# Altium PCB PC110.PcbDoc (part 19 of 24)
Units mm, origin at the board's own origin, x right, y up, seen from the top; angles counter-clockwise.
Board outline 150.05 x 107.35 mm, 10 copper layers (In2.Cu, F.Cu, B.Cu, In1.Cu, In3.Cu, In4.Cu, In5.Cu, In6.Cu, In7.Cu, In8.Cu); 936 components, 1434 nets, 4891 pads, 6088 vias.
Unrouted connection lines stored in the file: 2995.
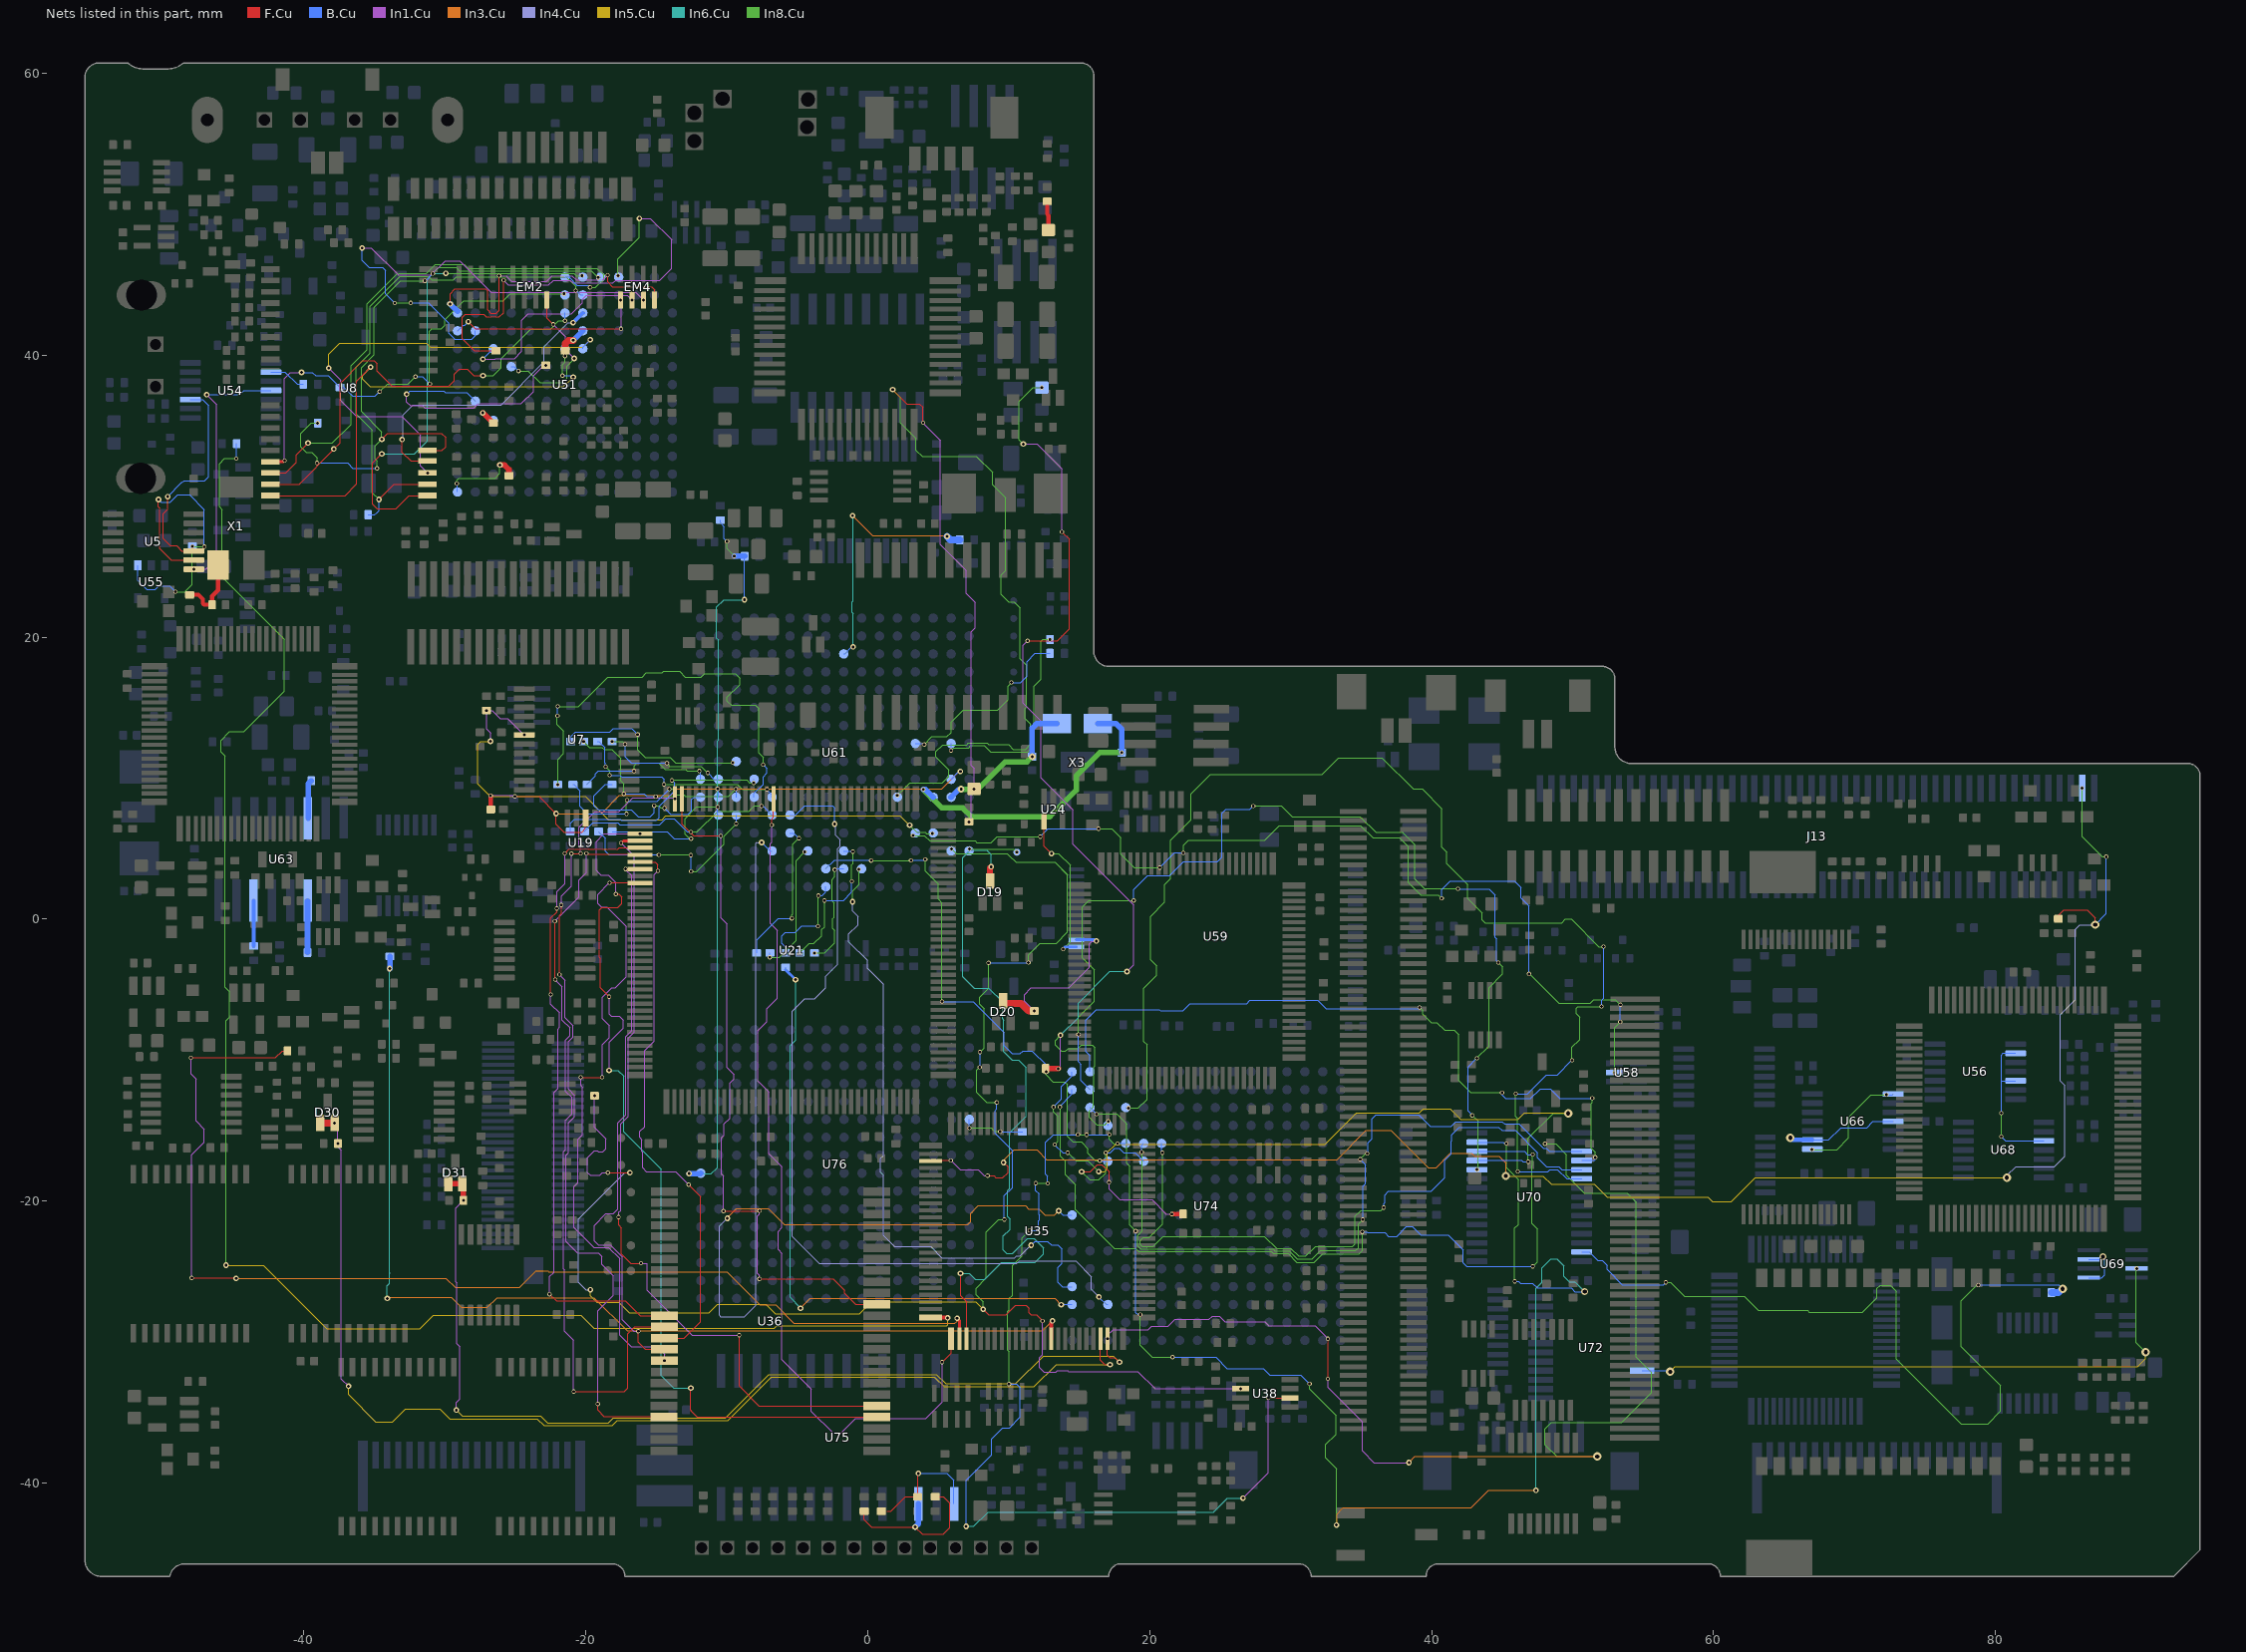
[diagram p26: the nets of this part, all layers, seen from the top]

## Via types
v1: diameter 0.3, hole 0.2, B.Cu to In8.Cu, tented both sides, 1934 vias
v2: diameter 0.4, hole 0.2, F.Cu to B.Cu, tented both sides, 1902 vias
v3: diameter 0.3, hole 0.2, F.Cu to In1.Cu, tented both sides, 1729 vias
v4: diameter 0.6, hole 0.3, F.Cu to B.Cu, tented both sides, 354 vias
v5: diameter 0.5, hole 0.3, F.Cu to B.Cu, tented both sides, 136 vias
v6: diameter 0.4, hole 0.2, B.Cu to In8.Cu, tented both sides, 12 vias
v7: diameter 0.3, hole 0.2, F.Cu to B.Cu, tented both sides, 6 vias
v8: diameter 0.6, hole 0.2, F.Cu to B.Cu, tented both sides, 4 vias
v9: diameter 0.5, hole 0.2, B.Cu to In8.Cu, tented both sides, 3 vias
v10: diameter 0.5, hole 0.2, F.Cu to B.Cu, tented both sides, 2 vias
v11: diameter 0.4, hole 0.3, F.Cu to B.Cu, tented both sides, 2 vias
v12: diameter 0.3, hole 0.2, F.Cu to In4.Cu, tented both sides, 2 vias
v13: diameter 0.6, hole 0.3, B.Cu to In8.Cu, tented both sides, 1 vias
v14: diameter 0.3, hole 0.2, F.Cu to In3.Cu, tented both sides, 1 vias

## Nets (pads, with @x,y where several pads share a name; then routed paths per layer and width w, separated by ;. In a path a pad name is that pad's centre, name@x,y a point inside that pad or via, vN(x,y) a via of type N, cw(c..) or ccw(c..) an arc to the next point about the centre after c; other vN are vias at no path point) (continued)
Net-(U51-P11): EM2.8 U51.D6 | length 11.1
  F.Cu w0.08: EM2.8@-22.755,43.91 -22.755,42.635 v3(-22.31,42.19)
  In1.Cu w0.08: v3(-22.31,42.19) -21.45,41.33 -21.45,40.4 v2(-20.82,39.77)
  In8.Cu w0.08: v1(-24.77,38.88) -24.08,38.88 -23.26,38.06 -21.58,38.06 -21.32,38.32 -21.32,39.24 -20.82,39.74 v2(-20.82,39.77)
  B.Cu w0.08: U51.D6@-25.29,39.19 -25.08,39.19 v1(-24.77,38.88)
Net-(U51-P12): EM4.5 U51.A4 | length 14.1
  F.Cu w0.08: v2(-28.34,42.38) -27.83,41.87 v3(-17.49,41.87)
  In1.Cu w0.08: v3(-17.525,43.91) -17.49,43.875 v3(-17.49,41.87)
  B.Cu w0.08: U51.A4@-29.1,41.73 -29.09,41.73 -28.69,42.13 -28.59,42.13 v2(-28.34,42.38)
Net-(U51-P13): EM4.6 U51.C5 | length 15.1
  In1.Cu w0.08: v2(-27.3,39.72) -26.44,39.72 -26.39,39.77 -25.05,39.77 -24.55,40.27 -24.55,42.47 -24.08,42.94 -21,42.94 -20.24,43.7 -20.24,43.96 -19.96,44.24 -17.055,44.24 v3(-16.725,43.91)
  B.Cu w0.08: v2(-27.3,39.72) U51.C5@-26.56,40.46
Net-(U51-P14): EM4.7 U51.B4 | length 35.4
  In1.Cu w0.08: v2(-35.86,47.61) -35.23,47.61 -33.3,45.68 -30.99,45.68 -29.97,46.7 -28.94,46.7 -26.71,44.47 -16.46,44.47 v3(-15.9,43.91)
  In8.Cu w0.08: v1(-33.55,43.7) -32.42,43.7 v1(-32.41,43.71)
  B.Cu w0.08: v2(-35.86,47.61) -35.86,46.71 -35.38,46.23 -34.42,46.23 -34.2,46.01 -34.2,44.35 v1(-33.55,43.7) ; v1(-32.41,43.71) -32.4,43.7 -31.15,43.7 -29.72,42.27 -29.72,41.56 -29.29,41.13 -28.07,41.13 -27.83,41.37 U51.B4@-27.83,41.73
Net-(U51-P15): EM4.8 U51.A3 | length 22.3
  F.Cu w0.08: v2(-29.62,43.64) -29.62,44.37 -29.28,44.71 -27.1,44.71 -26.96,44.57 -26.96,43.21 -26.74,42.99 -26.36,42.99 -26.15,43.2 v3(-26.15,45.64) ; v3(-18.45,45.68) -18.45,45.19 -18.1,44.84 -15.32,44.84 -15.125,44.645 EM4.8@-15.125,43.91
  In1.Cu w0.08: v3(-26.15,45.64) -25.64,45.64 -25.25,45.25 -22.77,45.25 -22.38,45.64 -20.97,45.64 -20.67,45.34 -18.79,45.34 v3(-18.45,45.68)
  B.Cu w0.08: U51.A3@-29.1,43 U51.A3@-29.1,43.12
  B.Cu w0.4: v2(-29.62,43.64) U51.A3@-29.1,43.12
Net-(U51-RASA#): R21.2 U51.H4 | length 2.1
  F.Cu w0.5: R21.2@-21.46,40.31 -21.46,40.84 -21.24,41.06 v2(-20.89,41.06)
  B.Cu w0.08: v2(-20.89,41.06) v2@-20.88,41.06
  B.Cu w0.4: v2@-20.88,41.06 U51.H4@-20.21,41.73
Net-(U51-RSET): R66.2 U51.A13 | length 5.9
  F.Cu w0.4: v2(-26.09,32.22) -25.77,32.22 -25.45,31.9 R66.2@-25.45,31.46
  In8.Cu w0.08: v1(-29.15,30.9) -29.15,31.12 -28.99,31.28 -26.42,31.28 -26.09,31.61 v2(-26.09,32.22)
  B.Cu w0.08: v1(-29.15,30.9) -29.1,30.85 U51.A13@-29.1,30.3
Net-(U51-SA0): R265.1 U8.16 U51.G2 | length 33.6
  F.Cu w0.2: U8.16@-42.37,32.45 -41.44,32.45 v3(-41.37,32.52)
  In1.Cu w0.08: v3(-41.37,32.52) -41.37,38.36 -40.95,38.78 v2(-40.16,38.78)
  In8.Cu w0.08: v1(-34.62,37.42) -34.07,37.97 -32.6,37.97 v1(-32.08,38.49) ; v1(-31.06,37.97) -31.1,38.01 -31.1,41.7 -30.91,41.89 -30.23,41.89 -29.99,42.13 -29.99,42.53 -28.66,43.86 -25.86,43.86 -25.36,44.36 v1(-21.54,44.36)
  B.Cu w0.08: v2(-40.16,38.78) -39.41,38.78 -39.17,38.54 -38.27,38.54 R265.1@-37.43,37.7 -37.13,37.7 -36.52,37.09 -34.95,37.09 v1(-34.62,37.42) ; v1(-32.08,38.49) -31.58,38.49 v1(-31.06,37.97) ; v1(-21.54,44.36) -21.54,44.33 U51.G2@-21.48,44.27
Net-(U51-SA1): U8.17 U51.G1 | length 38.3
  F.Cu w0.08: U8.17@-42.37,31.65 -41.29,31.65 -40.53,32.41 -40.53,32.94 v2(-39.7,33.77)
  In8.Cu w0.08: v2(-39.7,33.77) -37.98,33.77 -36.66,35.09 -36.66,39.26 -35.52,40.4 -35.52,43.65 -33.37,45.8 -31.3,45.8 -30.67,46.43 -28.6,46.43 -28.33,46.16 -19.21,46.16 -18.73,45.68 -18.73,45.39 -19.31,44.81 v1(-19.7,44.81)
  B.Cu w0.08: U51.G1@-21.48,45.54 -21.19,45.54 -20.61,44.96 -19.85,44.96 v1(-19.7,44.81)
Net-(U51-SA2): U8.18 U51.G3 | length 31.5
  F.Cu w0.08: U8.18@-42.37,30.85 -40.33,30.85 -37.87,33.31 v2(-37.87,33.35) -37.43,33.79 -37.43,37.99 -35.82,39.6 -35.03,39.6 -34.82,39.39 -34.82,38.89 -33.73,37.8 -29.71,37.8 -29.32,38.19 -29.32,38.67 -28.97,39.02 -28.41,39.02 -27.95,38.56 v2(-27.29,38.56)
  In8.Cu w0.08: v2(-27.29,38.56) -26.58,38.56 -26.01,39.13 -26.01,39.74 -23.9,41.85 -22.51,41.85 -21.92,42.44 v1(-21.48,42.44)
  B.Cu w0.08: v1(-21.48,42.44) U51.G3@-21.48,43
Net-(U51-SA3): U8.19 U51.G5 | length 34.5
  F.Cu w0.08: U8.19@-42.37,30.05 -37.08,30.05 -36.24,30.89 -36.24,38.17 v2(-35.26,39.15)
  In5.Cu w0.08: v2(-35.26,39.15) -35.84,38.57 -35.84,38.29 -35.31,37.76 -21.58,37.76 v2(-20.89,38.45)
  In8.Cu w0.08: v1(-21.65,38.56) -21.65,39.33 -21.48,39.5 v1(-21.48,39.94)
  B.Cu w0.08: v1(-21.65,38.56) -21,38.56 v2(-20.89,38.45) ; v1(-21.48,39.94) U51.G5@-21.48,40.46
Net-(U51-SA4): U8.22 U51.H1 | length 34.7
  F.Cu w0.08: v2(-34.47,33.01) -35.13,32.35 -35.13,29.44 -34.8,29.11 -33.47,29.11 -32.53,30.05 U8.22@-31.22,30.05
  In6.Cu w0.08: v2(-34.47,33.01) -32.15,33.01 -31.23,33.93 -31.23,45.44 -30.86,45.81 v2(-29.93,45.81)
  In8.Cu w0.08: v2(-29.93,45.81) -20.84,45.81 -20.67,45.64 v1(-20.27,45.64)
  B.Cu w0.08: U51.H1@-20.22,45.47 -20.21,45.48 U51.H1@-20.21,45.54
Net-(U51-SA5): R270.1 U8.23 U51.H2 | length 37.2
  F.Cu w0.08: v2(-34.67,29.77) -33.59,30.85 U8.23@-31.22,30.85
  In8.Cu w0.08: v2(-34.67,29.77) -35.15,30.25 -35.15,34.69 -36.29,35.83 -36.29,39.17 -35.3,40.16 -35.3,43.47 -33.17,45.6 -31.17,45.6 -30.91,45.34 -29.41,45.34 -29.18,45.57 -21.41,45.57 -20.71,44.87 v1(-20.71,44.59)
  B.Cu w0.08: R270.1@-35.44,28.69 -34.97,28.69 -34.82,28.84 -34.81,28.84 -34.67,28.98 v2(-34.67,29.77) ; v1(-20.71,44.59) -20.7,44.59 -20.38,44.27 U51.H2@-20.21,44.27
Net-(U51-SA6): U8.24 U51.H5 | length 33.3
  In1.Cu w0.08: v2(-38.24,39.09) -37.37,38.22 -37.37,36.77 -36.26,35.66 -33.03,35.66 -31.73,34.36 -31.73,32.16 v3(-31.22,31.65)
  In5.Cu w0.08: v2(-38.24,39.09) -38.24,40.09 -37.46,40.87 -31.32,40.87 -31.01,40.56 -20.22,40.56 v2(-19.68,41.1)
  B.Cu w0.08: U51.H5@-20.21,40.46 -20.21,40.57 v2(-19.68,41.1)
Net-(U51-SA7): U8.25 U51.H3 | length 21.1
  F.Cu w0.08: v2(-33.03,34.02) -33.03,33.12 -32.41,32.5 U8.25@-31.22,32.5
  In4.Cu w0.08: v2(-33.03,34.02) -32.98,34.07 -32.98,35.77 -32.27,36.48 -26.01,36.48 -22.95,39.54 -22.95,40.62 -21.25,42.32 -21.24,42.31 v2(-20.9,42.31)
  B.Cu w0.3: v2(-20.9,42.31) U51.H3@-20.21,43
Net-(U51-SA8): R279.1 U8.26 U51.J1 | length 45.7
  F.Cu w0.08: v2(-34.47,34.04) -34.05,34.46 -30.24,34.46 -29.94,34.16 -29.94,33.51 -30.2,33.25 U8.26@-31.22,33.25
  In8.Cu w0.08: v1(-39.06,32.36) -39.06,32.73 -39.43,33.1 -39.81,33.1 -40.22,33.51 -40.22,34.45 -39.48,35.19 v1(-39.02,35.19) ; v1(-34.8,31.98) -34.8,32.52 -34.93,32.65 -34.93,33.58 v2(-34.47,34.04) -34.47,34.57 -35.91,36.01 -35.91,39.12 -35,40.03 -35,43.41 -33.13,45.28 v1(-31.41,45.28) ; v1(-30.84,45.79) -30.42,46.21 -29.19,46.21 -28.97,45.99 -19.6,45.99 v1(-19.13,45.52)
  B.Cu w0.08: v1(-39.06,32.36) -36.9,32.36 -36.52,31.98 v1(-34.8,31.98) ; v1(-31.41,45.28) -31.35,45.28 v1(-30.84,45.79) ; v1(-19.13,45.52) -18.96,45.52 U51.J1@-18.94,45.54
Net-(U51-SHFCLK): R20.1 U51.B8 | length 17.8
  In1.Cu w0.08: v2(-32.71,37.24) -32.71,36.68 -32.45,36.42 -31.58,36.42 -31.4,36.24 -27.95,36.24 -27.61,36.58 -24.57,36.58 -23.72,37.43 -23.72,38.54 -22.97,39.29 v3(-22.84,39.29)
  B.Cu w0.08: v2(-32.71,37.24) -32.48,37.47 -30.07,37.47 -29.96,37.36 -28.43,37.36 -27.83,36.76 U51.B8@-27.83,36.745
Net-(U51-VSYNC): R46.2 U51.C9 | length 2
  F.Cu w0.4: v2(-27.31,35.91) -27.28,35.91 R46.2@-26.56,35.19
  B.Cu w0.08: v2(-27.31,35.91) -27.26,35.91 -26.73,35.38 U51.C9@-26.56,35.38
Net-(U51-WEA#): R16.2 U51.K1 | length 32.2
  F.Cu w0.08: R16.2@-26.37,40.31 -27.91,40.31 -28.77,41.17 -28.77,42.68 -28.55,42.9 -27.23,42.9 -27.05,42.72 -26.13,42.72 -25.83,43.02 v3(-25.83,45.32)
  In1.Cu w0.08: v3(-25.83,45.32) -25.49,44.98 -22.64,44.98 -22.3,45.32 -21.12,45.32 -20.92,45.12 -18.07,45.12 -17.87,45.32 -14.77,45.32 -13.92,46.17 -13.92,48.19 -15.43,49.7 v2(-16.2,49.7)
  In8.Cu w0.08: v1(-17.71,45.64) -17.71,46.83 -16.2,48.34 v2(-16.2,49.7)
  B.Cu w0.08: v1(-17.71,45.64) -17.71,45.58 U51.K1@-17.67,45.54
Net-(U54A-C): U5.10 U54.3 | length 15.6
  F.Cu w0.08: v2(-49.66,29.97) -49.66,29.09 -49.98,28.77 -49.98,27.01 -49.47,26.5 -49.03,26.5 -48.65,26.12 U5.10@-47.807,26.12
  B.Cu w0.08: v2(-49.66,29.97) -48.65,30.98 -48.63,30.98 -48.5,31.11 -47.03,31.11 -46.77,31.37 -46.77,36.445 -47.185,36.86 U54.3@-48.055,36.86
Net-(U54B-C): U5.8 U54.11 | length 18.6
  In1.Cu w0.08: v3(-47.807,24.82) -46.92,24.82 -46.18,25.56 -46.18,36.49 v2(-46.89,37.2)
  B.Cu w0.08: v2(-46.89,37.2) -44.56,37.2 -44.25,37.51 U54.11@-42.33,37.51
Net-(U54B-Q): R286.2 U54.9 | length 2.6
  B.Cu w0.08: U54.9@-42.33,38.81 -41.33,38.81 -40.47,37.95 R286.2@-40.04,37.95
Net-(U55-OUT): R278.1 U5.9 U55.1 | length 22.1
  F.Cu w0.08: v2(-50.31,29.77) -50.31,29.24 -50.23,29.16 -50.23,26.28 -49.42,25.47 U5.9@-47.807,25.47
  In8.Cu w0.08: v1(-49.1,23.22) -48.44,23.22 -47.91,23.75 v1(-47.91,26.45) -47.88,26.42 v1(-47.06,26.42)
  B.Cu w0.08: U55.1@-51.77,25.09 -51.77,24.03 -51.13,23.39 -50.535,23.39 -50.3,23.625 -49.505,23.625 v1(-49.1,23.22) ; v2(-50.31,29.77) -50.12,29.58 -49.46,29.58 -48.95,30.09 -48.09,30.09 -47.06,29.06 v1(-47.06,26.42)
Net-(U56-Pad2): U56.2 U56.5 U68.3 | length 11
  In8.Cu w0.08: v1(80.41,-15.42) v1(80.41,-13.76)
  B.Cu w0.08: v1(80.41,-15.42) 80.71,-15.72 U68.3@83.43,-15.72 ; v1(80.41,-13.76) 80.41,-11.46 ; U56.5@81.423,-11.46 80.41,-11.46 ; U56.2@81.423,-9.51 80.54,-9.51 80.41,-9.64 80.41,-11.46
Net-(U59-RP#): D20.3 R113.2 U59.10 | length 13
  F.Cu w0.08: D20.3@9.62,-5.8 D20.3@9.81,-5.99
  F.Cu w0.5: D20.3@9.81,-5.99 10.89,-5.99 11.41,-6.51 v3(11.82,-6.51)
  In1.Cu w0.08: v3(11.82,-6.51) 11.12,-5.81 11.12,-5.34 11.6,-4.86 14.28,-4.86 15.72,-3.42 15.72,-1.75 15.9,-1.57 16.19,-1.57 v2(16.21,-1.55)
  B.Cu w0.2: U59.10@14.79,-1.46 16.12,-1.46 v2(16.21,-1.55)
Net-(U59-WE#): U24.4 U59.9 | length 11.3
  F.Cu w0.08: U24.4@12.51,6.95 12.51,5.18 v2(13.03,4.66)
  In8.Cu w0.08: v2(13.03,4.66) 13.54,4.66 14.36,3.84 14.36,-1.62 v1(13.86,-2.12)
  B.Cu w0.2: v1(13.86,-2.12) 14.02,-1.96 U59.9@14.79,-1.96
Net-(U61-CPUCLK33): R251.2 U61.J3 | length 18.6
  In3.Cu w0.08: v2(-1.07,28.62) 0.33,27.22 5.55,27.22 v2(5.62,27.15)
  In6.Cu w0.08: v2(-1.07,28.62) -1.025,28.575 -1.025,22.575 -1.1,22.5 -1.1,21.75 -1.04,21.69 v2(-1.04,19.31)
  B.Cu w0.08: U61.J3@-1.725,18.84 -1.6,18.84 -1.13,19.31 v2(-1.04,19.31)
  B.Cu w0.5: v2(5.62,27.15) 5.85,26.92 R251.2@6.53,26.92
Net-(U61-IOR#): R326.1 U61.J15 | length 7.8
  In8.Cu w0.08: v1(-3.77,-2.4) -3.06,-2.4 -2.34,-1.68 -2.34,-0.81 -2.48,-0.67 -2.48,0.05 -2.39,0.14 -2.39,1.16 -2.53,1.3 -2.53,2.82 -2.34,3.01 v1(-2.34,3.51)
  B.Cu w0.08: v1(-2.34,3.51) -2.275,3.575 U61.J15@-1.705,3.575
Net-(U61-IOW#): R318.2 U61.J14 | length 10.4
  In8.Cu w0.08: v1(-4.82,-2.4) -4.15,-1.73 -3.82,-1.73 -3.27,-1.18 -3.27,-0.74 -3.07,-0.54 v1(-3.07,1.33) ; v1(-1.13,2.69) -1.13,3.86 -1.05,3.94 v1(-1.05,4.79)
  B.Cu w0.08: v1(-3.07,1.33) -1.72,1.33 -1.13,1.92 v1(-1.13,2.69) ; U61.J14@-1.71,4.84 -1.1,4.84 v1(-1.05,4.79)
Net-(U61-MEMR#): R322.2 U61.F13 | length 10.7
  In8.Cu w0.08: v1(-5.38,0.06) -5.38,0.3 -5.32,0.36 -5.32,5.31 v1(-4.88,5.75)
  B.Cu w0.08: R322.2@-7.88,-2.4 -7.88,-1.47 -6.35,0.06 v1(-5.38,0.06) ; U61.F13@-5.52,6.11 -5.26,6.11 -4.9,5.75 v1(-4.88,5.75)
Net-(U61-MEMW#): R324.2 U61.G14 | length 9.2
  In8.Cu w0.08: v1(-6.94,-2.71) -6.28,-2.71 -5.08,-1.51 -5.08,4.17 v1(-4.47,4.78)
  B.Cu w0.08: v1(-6.94,-2.71) R324.2@-6.94,-2.4
Net-(U61-PS{slash}RCLR#): C79.1 R116.1 U61.M11 | length 79.6
  F.Cu w0.08: v2(1.77,37.56) 2.78,36.55 3.68,36.55 3.92,36.31 v3(3.92,35.21)
  In1.Cu w0.08: v3(3.92,35.21) 5.16,33.97 5.16,26.58 7,24.74 7,23.12 7.64,22.48 7.64,20.68 7.35,20.39 7.35,10.9 7.54,10.71 v3(7.54,9.235) 7.33,9.025 7.33,7.06 v3(7.17,6.9)
  In8.Cu w0.08: v2(1.77,37.56) 2.32,37.01 2.32,35.2 3.43,34.09 3.43,33.26 3.86,32.83 7.71,32.83 8.86,31.68 8.86,30.8 9.78,29.88 9.78,24.73 9.47,24.42 9.47,23.04 9.99,22.52 10.38,22.52 10.81,22.09 10.81,18.47 11.25,18.03 11.25,15.04 11.15,14.94 11.15,14.24 11.54,13.85 11.54,12.41 11.18,12.05 10.32,12.05 9.99,12.38 8.58,12.38 8.48,12.48 7.13,12.48 7.01,12.36 5.32,12.36 4.84,11.88 4.84,11.52 5.76,10.6 5.76,10.14 5.28,9.66 2.98,9.66 v1(2.1,8.78)
Net-(U61-PWRGD): R96.2 U19.2 U61.R10 | length 40.9
  F.Cu w0.08: v3(-26.75,8.77) v3@-26.74,8.76 ; v3(-25.02,8.72) -23.33,8.72 v2(-22.1,7.49) -22.1,6.73 -21.55,6.18 -20.282,6.18 -20.01,6.452 U19.2@-20.01,7.19
  F.Cu w0.3: R96.2@-26.74,7.78 v3@-26.74,8.76
  In1.Cu w0.08: v3(-26.75,8.77) -25.07,8.77 v3(-25.02,8.72)
  In3.Cu w0.08: v2(-22.1,7.49) -18.89,7.49 -17.61,8.77 -13.99,8.77 -13.52,9.24 5.24,9.24 6.48,10.48 v2(6.57,10.48)
  B.Cu w0.08: U61.R10@5.91,9.92 6.47,10.48 v2(6.57,10.48)
Net-(U61-PWRGD_P13): R49.1 U7.6 U61.P13 | length 43.4
  In1.Cu w0.08: v2(-26.76,12.62) -26.76,13.22 -27.04,13.5 v3(-27.04,14.8) -26.62,14.8 -26.061,14.241 -25.529,14.241 v3(-24.362,13.075)
  In5.Cu w0.08: v2(-26.76,12.62) -27.44,12.62 -27.66,12.4 -27.66,9.62 -27.67,9.61 -26.77,8.71 -20.03,8.71 -18.39,7.07 -14.59,7.07 -14.32,7.34 2.3,7.34 v2(2.97,6.67)
  In8.Cu w0.08: v2(2.97,6.67) 3.47,6.17 4.07,6.17 4.16,6.08 v1(4.58,6.08)
Net-(U61-RAMA0): R346.2 U61.C12 | length 14.5
  In8.Cu w0.08: v1(-14.82,4.56) -12.57,4.56 v1(-12.55,4.54) ; v1(-12.53,3.39) -12.13,3.39 -10.2,5.32 -10.2,5.9 v1(-9.33,6.77)
  B.Cu w0.08: R346.2@-19.09,6.22 -18.6,5.73 -18.6,4.83 -18.59,4.82 -18.59,4.78 -18.37,4.56 v1(-14.82,4.56) ; v1(-12.55,4.54) -12.53,4.52 v1(-12.53,3.39) ; v1(-9.33,6.77) U61.C12@-9.33,7.38
Net-(U61-RAMA1): R338.2 U61.E12 | length 15.2
  In8.Cu w0.08: v1(-12.55,6.19) -12.09,6.19 -10.63,7.65 -8.43,7.65 -8.05,8.03 v1(-7.53,8.03)
  B.Cu w0.08: R338.2@-20.09,6.22 -20.09,6.24 -19.5,6.83 -17.72,6.83 -17.6,6.71 -14.75,6.71 -14.34,7.12 -13.745,7.12 -12.815,6.19 v1(-12.55,6.19) ; v1(-7.53,8.03) -7.44,8.03 U61.E12@-6.79,7.38
Net-(U61-RAMA2): R342.2 U61.B12 | length 10.7
  In8.Cu w0.08: v1(-12.53,5.71) -12.64,5.71 -12.95,6.02 -12.95,7.14 -12.13,7.96 v1(-10.64,7.96)
  B.Cu w0.08: R342.2@-18.12,6.22 -14.24,6.22 -13.73,5.71 v1(-12.53,5.71) ; v1(-10.64,7.96) -10.64,7.42 U61.B12@-10.6,7.38
Net-(U61-RAMA3): R337.2 U61.E11 | length 15.3
  In8.Cu w0.08: v1(-18.6,10.82) -18.31,10.53 v1(-18.31,10.21) ; v1(-14.45,9.56) -9.23,9.56 -8.88,9.21 v1(-7.14,9.21)
  B.Cu w0.08: R337.2@-19.16,12.6 -19.06,12.6 -18.64,12.18 -18.64,11.08 -18.6,11.04 v1(-18.6,10.82) ; v1(-18.31,10.21) -17.58,10.21 -17.45,10.08 -14.63,10.08 -14.45,9.9 v1(-14.45,9.56) ; v1(-7.14,9.21) -7.14,9.18 -6.79,8.83 U61.E11@-6.79,8.65
Net-(U61-RAMA4): R334.2 U61.C11 | length 14.6
  In8.Cu w0.08: v1(-20.15,12.6) -19.73,12.18 -18.85,12.18 -18.695,12.025 -18.145,12.025 -17.51,11.39 -17.51,9.8 -17.3,9.59 v1(-17.3,8.89) ; v1(-15.04,8.7) -13.68,8.7 -13.57,8.81 -13.03,8.81 -12.94,8.72 -9.87,8.72 v1(-9.37,9.22)
  B.Cu w0.08: v1(-17.3,8.89) -15.87,8.89 -15.68,8.7 v1(-15.04,8.7) ; v1(-9.37,9.22) -9.325,9.175 U61.C11@-9.325,8.655
Net-(U61-RAMA5): R333.2 U61.B11 | length 13.7
  In8.Cu w0.08: v1(-17.11,7.47) -17.11,8.407 v1(-17.072,8.445) ; v1(-14.06,9.23) -10.66,9.23 v1(-10.65,9.24)
  B.Cu w0.08: R333.2@-20.91,9.55 -20.85,9.55 -20.41,9.11 -20.41,8 -19.88,7.47 v1(-17.11,7.47) ; v1(-17.072,8.445) -16.987,8.36 -14.93,8.36 v1(-14.06,9.23) ; v1(-10.65,9.24) -10.6,9.19 U61.B11@-10.6,8.65
Net-(U61-RAMA6): R343.2 U61.A11 | length 12
  In8.Cu w0.08: v1(-15.15,8.05) -14.83,8.05 -14.67,7.89 v1(-14.43,7.89)
  B.Cu w0.08: R343.2@-18.13,9.55 -18.61,9.55 -19.415,8.745 -19.415,8.055 -19.11,7.75 -16.76,7.75 -16.27,7.26 -15.43,7.26 -15.15,7.54 v1(-15.15,8.05) ; v1(-14.43,7.89) -13.965,7.425 -12.745,7.425 -12.48,7.69 -12.48,8.49 -12.32,8.65 U61.A11@-11.87,8.65
Net-(U61-RAMA7): R352.2 U61.D11 | length 31.6
  In8.Cu w0.08: v1(-22,14.43) -22.03,14.4 -22.03,13.81 -21.57,13.35 -21.57,11.74 -21.98,11.33 v1(-21.98,9.55) ; v1(-21.99,15.09) -20.52,15.09 -18.44,17.17 -16,17.17 -15.7,17.47 -14.59,17.47 -14.46,17.6 -13.36,17.6 -12.94,17.18 -11.82,17.18 -11.58,17.42 -9.4,17.42 -9.07,17.09 -9.07,16.65 -9.97,15.75 -9.97,15.48 -9.67,15.18 -7.96,15.18 -7.73,14.95 -7.73,11.79 -7.42,11.48 v1(-7.42,10.96)
  B.Cu w0.08: v1(-22,14.43) -22,15.08 v1(-21.99,15.09) ; U61.D11@-8.06,8.65 -8.06,8.92 -7.42,9.56 -7.42,10.1 -7.15,10.37 -7.15,10.69 v1(-7.42,10.96)
Net-(U61-RAMA8): R347.2 U61.B10 | length 9.2
  In8.Cu w0.08: v1(-18.13,12.6) -17.4,12.6 v1(-17.21,12.41) ; v1(-14.24,11.07) -14.24,11.05 -14.25,11.04 -14.06,10.85 -11.83,10.85 v1(-11.35,10.37)
  B.Cu w0.08: v1(-17.21,12.41) -17.21,11.49 -16.79,11.07 v1(-14.24,11.07) ; v1(-11.35,10.37) -11.34,10.37 -10.89,9.92 U61.B10@-10.6,9.92
Net-(U61-RAMA9): R329.2 U61.A10 | length 9.7
  In8.Cu w0.08: v1(-16.57,10.51) -16.57,10.87 -16.37,11.07 -14.83,11.07 -14.38,10.62 -12.91,10.62 -12.8,10.51 v1(-11.94,10.51)
  B.Cu w0.08: R329.2@-19.91,9.55 -19.31,10.15 -19.31,10.3 -19.1,10.51 v1(-16.57,10.51) ; v1(-11.94,10.51) -11.865,10.435 U61.A10@-11.865,9.925
Net-(U61-RAMA10): R345.2 U61.D10 | length 16.4
  In8.Cu w0.08: v1(-13.89,9.85) -13.87,9.87 -8.58,9.87 -8.38,9.67 v1(-8.09,9.67)
  B.Cu w0.08: R345.2@-21.1,6.22 -21.1,6.8 -20.82,7.08 -17.54,7.08 -17.48,7.02 -14.99,7.02 -14.81,7.2 -14.81,8.01 -13.71,9.11 -13.71,9.67 v1(-13.89,9.85) ; v1(-8.09,9.67) -8.09,9.89 U61.D10@-8.06,9.92
Net-(U61-RAMA11): R335.2 U61.C9 | length 13.7
  In8.Cu w0.08: v1(-16.32,13.1) -16.32,12 -15.78,11.46 -14,11.46 -13.64,11.1 v1(-9.57,11.1)
  B.Cu w0.08: R335.2@-21.07,12.6 -21.07,12.93 -20.72,13.28 -18.28,13.28 -18.03,13.53 -16.75,13.53 v1(-16.32,13.1)
Net-(U61-RESET): U58.2 U61.N13 | length 70.8
  In8.Cu w0.08: v1(3.21,5.93) 4.02,5.93 4.4,5.55 7.61,5.55 7.74,5.42 8.76,5.42 9.19,5.85 v1(12.23,5.85) ; v1(16.38,6.42) 17.31,6.42 17.95,5.78 17.95,4.61 18.9,3.66 v1(20.72,3.66) ; v1(22.39,4.71) 22.39,5.25 22.75,5.61 28.15,5.61 29.18,6.64 34.97,6.64 35.83,5.78 37.7,5.78 38.35,5.13 38.35,2.59 39.22,1.72 40.47,1.72 v1(40.71,1.48) ; v1(46.9,-3.88) 46.93,-3.88 49.02,-5.97 51.24,-5.97 51.5,-5.71 53.03,-5.71 v1(53.39,-6.07) ; v1(52.98,-10.87) 52.98,-7.69 v1(53.38,-7.29)
  B.Cu w0.08: v1(12.23,5.85) 12.8,6.42 v1(16.38,6.42) ; v1(20.72,3.66) 21.77,4.71 v1(22.39,4.71) ; v1(40.71,1.48) 40.71,2.1 41.33,2.72 45.87,2.72 46.33,2.26 46.33,1.5 46.9,0.93 v1(46.9,-3.88) ; v1(53.38,-7.29) 53.38,-6.08 v1(53.39,-6.07)
Net-(U61-RTCOSCI): C251.2 U61.R11 X3.1 | length 10.9
  In8.Cu w0.4: v9(6.63,9.22) 7.81,9.22 9.75,11.16 11.29,11.16 v9(11.66,11.53)
  B.Cu w0.4: U61.R11@5.91,8.65 6.48,9.22 v9(6.63,9.22) ; v9(11.66,11.53) 11.66,13.55 11.99,13.88 X3.1@13.43,13.88
Net-(U61-RTCOSCO): C250.2 U61.P11 X3.4 | length 21.8
  In8.Cu w0.4: v1(3.94,9.21) 5.26,7.89 6.73,7.89 7.35,7.27 12.91,7.27 14.79,9.15 14.79,10.16 16.45,11.82 v1(18.02,11.82)
  B.Cu w0.4: v1(3.94,9.21) 4.08,9.21 U61.P11@4.64,8.65 ; X3.4@16.33,13.88 17.61,13.88 18.02,13.47 v1(18.02,11.82)
Net-(U61-TP1): J14.1 U61.T14 | length 3.5
  In8.Cu w0.08: v1(7.21,4.98) 10.35,4.98 v1(10.58,4.75)
Net-(U61-UNKNOWN3): R246.2 U61.R8 | length 15.2
  In8.Cu w0.08: v1(5.91,11.97) 6.1,12.16 7.15,12.16 7.3,12.31 8.26,12.31 8.72,11.85 8.73,11.86 11.34,11.86 11.79,12.31 11.79,16.52 12.29,17.02 12.29,19.71 12.42,19.84 v1(12.93,19.84)
  B.Cu w0.08: v1(5.91,11.97) U61.R8@5.91,12.46
Net-(U61-UNKNOWN4): R249.2 U61.N8 | length 13.9
  In8.Cu w0.08: v1(4.01,12.39) 4.56,12.94 5.62,12.94 5.91,13.23 5.91,13.97 6.78,14.84 9.2,14.84 9.94,15.58 9.94,16.54 v1(10.19,16.79)
  B.Cu w0.08: U61.N8@3.37,12.46 3.94,12.46 v1(4.01,12.39) ; v1(10.19,16.79) 10.83,16.79 11.29,17.25 11.29,18.27 11.88,18.86 R249.2@12.93,18.86
Net-(U63-3XCPUCLK): R359.1 U63.14 | length 3.2
  B.Cu w0.08: U63.14@-43.56,1.31 U63.14@-43.55,1.3
  B.Cu w0.3: R359.1@-43.55,-1.9 U63.14@-43.55,1.3
Net-(U63-14.318MHz): R357.2 U63.11 | length 3.7
  B.Cu w0.08: U63.11@-39.74,1.28 U63.11@-39.71,1.31
  B.Cu w0.4: R357.2@-39.74,-2.36 U63.11@-39.74,1.28
Net-(U63-24MHz): R358.2 U63.6 | length 2.8
  B.Cu w0.08: U63.6@-39.71,7.16 U63.6@-39.69,7.18
  B.Cu w0.4: U63.6@-39.69,7.18 -39.69,9.6 R358.2@-39.47,9.82
Net-(U66-Pad1): U66.1 U66.8 | length 8.3
  In8.Cu w0.08: v1(66.98,-16.34) 68.76,-16.34 69.58,-15.52 69.58,-14.04 71.17,-12.45 v1(72.25,-12.45)
  B.Cu w0.08: v1(66.98,-16.34) 66.98,-16.328 U66.8@67.007,-16.3 ; v1(72.25,-12.45) 72.682,-12.45 U66.1@72.733,-12.4
Net-(U66-Pad4): U66.4 U66.9 | length 7.9
  B.Cu w0.08: U66.9@67.007,-15.65 68.15,-15.65 69.02,-14.78 70.88,-14.78 71.31,-14.35 U66.4@72.733,-14.35
  B.Cu w0.3: v4(65.44,-15.5) 65.59,-15.65 U66.9@67.007,-15.65
Net-(U69-Pad5): U69.5 U69.7 | length 3.6
  B.Cu w0.08: U69.5@86.61,-25.425 87.545,-25.425 87.75,-25.22 87.75,-24.08 v5(87.61,-23.94) 87.425,-24.125 U69.7@86.61,-24.125
Net-(U70-A_VCC3#): U70.6 U74.P4 | length 89.9
  In8.Cu w0.08: v1(18.49,-13.39) 19.19,-13.39 19.81,-12.77 19.81,-8.9 19.59,-8.68 19.59,-4.89 20.49,-3.99 20.49,-3.3 20.07,-2.88 20.07,0.21 21.07,1.21 21.07,2.47 21.48,2.88 21.48,5.6 22.93,7.05 22.93,8.89 24.31,10.27 32.23,10.27 33.4,11.44 36.49,11.44 38.7,9.23 39.34,9.23 40.73,7.84 40.73,5.11 41.08,4.76 41.08,3.93 42.55,2.46 42.55,1.46 43.58,0.43 43.58,-0.04 43.81,-0.27 49.22,-0.27 49.5,0.01 49.91,0.01 51.87,-1.95 v1(52.19,-1.95) ; v1(45.96,-12.38) 45.96,-13.97 46.1,-14.11 v1(46.1,-17.9) ; v1(49.96,-10) 49.96,-9.08 50.5,-8.54 50.5,-6.94 50.25,-6.69 50.25,-6.3 50.36,-6.19 v1(52.05,-6.19)
  B.Cu w0.08: U74.P4@18.3,-13.34 18.35,-13.39 v1(18.49,-13.39) ; v1(45.96,-12.38) 46.81,-12.38 48.14,-11.05 48.91,-11.05 v1(49.96,-10) ; v1(46.1,-17.9) 48.23,-17.9 48.38,-17.75 48.92,-17.75 49.58,-18.41 U70.6@50.645,-18.41 ; v1(52.05,-6.19) 52.05,-5.74 52.19,-5.6 v1(52.19,-1.95)
Net-(U70-A_VCC5#): U70.5 U74.M6 | length 48.7
  In8.Cu w0.08: v1(20.9,-16.57) 20.9,-21.63 19.96,-22.57 19.54,-22.57 19.33,-22.78 19.33,-23.08 19.46,-23.21 20.24,-23.21 20.96,-22.49 28.14,-22.49 29.01,-23.36 30.02,-23.36 30.56,-23.9 31.07,-23.9 31.76,-23.21 34.4,-23.21 34.58,-23.03 34.58,-21.06 34.99,-20.65 36.4,-20.65 v1(36.6,-20.45)
  B.Cu w0.08: U74.M6@20.84,-15.88 20.84,-16.51 v1(20.9,-16.57) ; v1(36.6,-20.45) 36.6,-20.17 36.68,-20.09 36.68,-19.57 36.95,-19.3 39.97,-19.3 40.94,-18.33 40.94,-17.09 41.38,-16.65 41.38,-15.765 41.44,-15.705 41.44,-15.28 41.97,-14.75 44.76,-14.75 44.99,-14.98 45.95,-14.98 47.52,-16.55 47.52,-16.93 48.14,-17.55 49.03,-17.55 49.24,-17.76 U70.5@50.645,-17.76
Net-(U70-A_VPP_PGM): U70.3 U74.M5 | length 50.1
  In8.Cu w0.08: v1(19.43,-16.52) 19.47,-16.56 19.47,-22.12 19.14,-22.45 19.14,-23.18 19.36,-23.4 28.75,-23.4 28.88,-23.53 29.9,-23.53 30.47,-24.1 31.53,-24.1 32.12,-23.51 34.6,-23.51 34.8,-23.31 34.8,-21.62 v1(35.12,-21.3) ; v1(34.93,-17.03) 35.35,-16.61 v1(35.43,-16.61)
  B.Cu w0.08: v1(19.43,-16.52) 19.43,-16.02 U74.M5@19.57,-15.88 ; v1(34.93,-17.03) 35.3,-17.4 35.3,-18.76 35.12,-18.94 v1(35.12,-21.3) ; v1(35.43,-16.61) 35.5,-16.54 35.5,-15.85 35.78,-15.57 35.78,-14.15 36.04,-13.89 39.1,-13.89 39.9,-14.69 41.39,-14.69 41.71,-14.37 45,-14.37 45.16,-14.53 46.21,-14.53 47.93,-16.25 48.15,-16.25 48.36,-16.46 U70.3@50.645,-16.46
Net-(U70-A_VPP_VCC): U70.4 U74.T2 | length 51.5
  In8.Cu w0.08: v1(39.15,-6.26) 39.38,-6.49 39.38,-6.74 39.96,-7.32 40.37,-7.32 40.92,-7.87 41.6,-7.87 41.92,-8.19 41.92,-11.45 42.77,-12.3 v1(45,-12.3) ; v1(51.39,-12.7) 51.39,-12.99 51.31,-13.07 51.31,-16.24 51.61,-16.54 v1(51.61,-16.89)
  B.Cu w0.08: U74.T2@15.76,-10.8 15.76,-9.68 15.47,-9.39 15.47,-7.15 16.21,-6.41 20.68,-6.41 20.77,-6.5 22.35,-6.5 22.86,-5.99 26.89,-5.99 27.12,-5.76 31.93,-5.76 32.505,-6.335 39.075,-6.335 v1(39.15,-6.26) ; v1(45,-12.3) 45,-12.46 45.25,-12.71 47.02,-12.71 47.7,-12.03 48.41,-12.03 49.08,-12.7 v1(51.39,-12.7) ; U70.4@50.645,-17.11 51.56,-17.11 51.61,-17.06 v1(51.61,-16.89)
Net-(U70-B_VCC3#): U70.26 U74.R2 | length 73.7
  In8.Cu w0.08: v1(14.95,-8.16) 14.95,-6.94 16.06,-5.83 16.06,-3.6 15.21,-2.75 15.21,0.85 15.69,1.33 v1(18.87,1.33) ; v1(27.35,8.03) 27.36,8.04 29.34,8.04 30.11,7.27 34.93,7.27 36.04,6.16 37.91,6.16 38.79,5.28 38.79,2.85 39.48,2.16 v1(41.86,2.16) ; v1(42.88,-13.91) 43.29,-14.32 43.29,-17.69 v1(43.22,-17.76) ; v1(43.2,-9.86) 44.06,-9 44.06,-4.86 45.04,-3.88 45.04,-3.39 v1(44.725,-3.075)
  B.Cu w0.08: v1(14.95,-8.16) 14.95,-10.11 15.13,-10.29 15.13,-11.44 U74.R2@15.76,-12.07 ; v1(18.87,1.33) 18.87,2.09 19.86,3.08 21.4,3.08 22.41,4.09 24.81,4.09 25.13,4.41 25.13,7.52 25.41,7.8 27.12,7.8 v1(27.35,8.03) ; v1(41.86,2.16) 41.88,2.14 44.06,2.14 44.5,1.7 44.5,-1.3 44.6,-1.4 44.6,-2.95 v1(44.725,-3.075) ; v1(42.88,-13.91) 42.58,-13.61 42.58,-10.48 v1(43.2,-9.86)
Net-(U70-B_VCC5#): U70.27 U74.T1 | length 55.1
  In5.Cu w0.08: v2(16.38,-17.9) 16.81,-17.9 17.01,-17.7 17.01,-16.54 17.59,-15.96 32.45,-15.96 34.67,-13.74 39.11,-13.74 39.4,-13.45 41.32,-13.45 42.05,-14.18 46.14,-14.18 46.6,-13.72 49.62,-13.72 v4(49.68,-13.78)
  In8.Cu w0.08: v1(13.17,-13.32) 13.17,-13.67 13.5,-14 13.5,-15.75 v1(13.26,-15.99) ; v1(14.19,-16.57) 14.75,-17.13 15.61,-17.13 v2(16.38,-17.9) ; v1(46.85,-17.2) 46.85,-15.55 48.62,-13.78 v4(49.68,-13.78)
  B.Cu w0.08: v1(13.17,-13.32) 13.74,-12.75 13.74,-11.86 14.49,-11.11 U74.T1@14.49,-10.83 ; v1(13.26,-15.99) 13.84,-16.57 v1(14.19,-16.57) ; U70.27@43.22,-17.11 46.39,-17.11 46.48,-17.2 v1(46.85,-17.2)
Net-(U70-B_VPP_PGM): U70.29 U74.P2 | length 97.8
  In3.Cu w0.08: v2(33.25,-42.97) 33.28,-42.94 33.28,-42.19 33.72,-41.75 42.81,-41.75 44.05,-40.51 v2(47.4,-40.51)
  In6.Cu w0.08: v2(47.4,-40.51) 47.4,-26.17 47.815,-25.755 47.815,-24.735 48.45,-24.1 48.89,-24.1 49.385,-24.595 49.385,-25.345 49.75,-25.71 50.15,-25.71 v5(50.86,-26.42)
  In8.Cu w0.08: v1(16.23,-13.82) 17.68,-13.82 18.37,-14.51 18.37,-17.32 18.58,-17.53 18.58,-21.69 v1(19.01,-22.12) ; v1(19.33,-28.03) 19.33,-30.22 20.17,-31.06 v1(21.63,-31.06) ; v1(31.34,-32.96) 31.34,-33.31 33.22,-35.19 33.22,-36.53 32.49,-37.26 32.49,-38.22 33.25,-38.98 v2(33.25,-42.97) ; v1(45.3,-15.92) 45.3,-17.62 46.16,-18.48 46.16,-21.64 45.89,-21.91 v1(45.89,-25.69)
  B.Cu w0.08: U74.P2@15.76,-13.34 15.76,-13.35 v1(16.23,-13.82) ; v1(19.01,-22.12) 19.02,-22.13 19.02,-27.9 19.15,-28.03 v1(19.33,-28.03) ; v1(21.63,-31.06) 24.69,-31.06 25.49,-31.86 28.05,-31.86 28.51,-32.32 30.7,-32.32 v1(31.34,-32.96) ; U70.29@43.22,-15.81 45.01,-15.81 45.03,-15.83 45.08,-15.83 45.17,-15.92 v1(45.3,-15.92) ; v1(45.89,-25.69) 46.17,-25.69 46.31,-25.83 47.16,-25.83 47.49,-26.16 49.9,-26.16 50.16,-26.42 v5(50.86,-26.42)
Net-(U70-B_VPP_VCC): U70.28 U74.R1 | length 59.4
  In8.Cu w0.08: v1(13.63,-13.32) 13.67,-13.36 13.67,-16.81 14.01,-17.15 14.01,-18.12 14.72,-18.83 14.72,-20.61 17.48,-23.37 19.01,-23.37 19.22,-23.58 28.64,-23.58 28.78,-23.72 29.81,-23.72 30.43,-24.34 31.65,-24.34 32.26,-23.73 34.85,-23.73 35.08,-23.5 v1(35.08,-22.18) ; v1(47.16,-16.69) 47.16,-17.45 47.12,-17.49 47.12,-21.6 47.5,-21.98 47.5,-24.3 v1(47.17,-24.63)
  B.Cu w0.08: v1(13.63,-13.32) 13.63,-13.26 14.495,-12.395 U74.R1@14.495,-12.09 ; v1(35.08,-22.18) 35.41,-22.18 35.45,-22.22 36.68,-22.22 36.95,-22.49 37.52,-22.49 38.2,-21.81 38.63,-21.81 39.23,-22.41 41.19,-22.41 42.24,-23.46 42.24,-24.38 42.5,-24.64 47.16,-24.64 v1(47.17,-24.63) ; U70.28@43.22,-16.46 46.58,-16.46 46.81,-16.69 v1(47.16,-16.69)
Net-(U70-SHDN#): R363.1 U70.14 | length 57.9
  In8.Cu w0.08: v1(56.61,-25.76) 56.93,-25.76 57.93,-26.76 62.16,-26.76 63.15,-27.75 66.66,-27.75 66.78,-27.87 70.57,-27.87 71.59,-26.85 71.59,-26.2 71.83,-25.96 72.52,-25.96 72.96,-26.4 72.96,-31.2 77.55,-35.79 79.45,-35.79 80.35,-34.89 80.35,-33.09 77.57,-30.31 77.57,-27.08 78.7,-25.95 v1(78.77,-25.95)
  B.Cu w0.08: U70.14@50.645,-23.61 51.17,-23.61 51.77,-24.21 52.11,-24.21 52.44,-24.54 52.44,-24.84 53.52,-25.92 56.45,-25.92 v1(56.61,-25.76) ; v1@78.84,-25.88 v1(78.77,-25.95) 84.5,-25.95 v4(84.76,-26.21)
  B.Cu w0.5: R363.1@83.96,-26.49 84.48,-26.49 v4(84.76,-26.21)
Net-(U72-A6): U69.3 U72.9 | length 42.8
  In5.Cu w0.08: v4(56.92,-32.1) 57.27,-31.75 90.07,-31.75 90.65,-31.17 v4(90.65,-30.71)
  In8.Cu w0.08: v1(90.01,-24.775) 89.97,-24.815 89.97,-30.03 v4(90.65,-30.71)
  B.Cu w0.08: U72.9@54.93,-32.025 56.845,-32.025 v4(56.92,-32.1)
Net-(U74-CS#): U38.2 U74.M4 | length 68.3
  F.Cu w0.08: v3(28.42,-33.95) U38.2@29.94,-33.95
  In1.Cu w0.08: v2(26.62,-41.06) 28.42,-39.26 v3(28.42,-33.95)
  In6.Cu w0.08: v2(6.98,-43.06) 7.51,-43.06 8.53,-42.04 24.54,-42.04 25.52,-41.06 v2(26.62,-41.06)
  In8.Cu w0.08: v1(10.02,-32.97) 10.02,-30.66 9.92,-30.56 9.92,-27.82 10.04,-27.7 10.04,-26.89 10.26,-26.67 10.26,-24.56 10.94,-23.88 10.94,-22.61 v1(11.48,-22.07) ; v1(11.91,-18.72) 12.74,-18.72 v1(12.76,-18.74) ; v1(14.91,-15.28) 15.52,-15.28 v1(15.53,-15.29) ; v1(17.15,-15.28) 17.15,-15.61 17.46,-15.92 v1(17.71,-15.92)
  B.Cu w0.08: v2(6.98,-43.06) 6.98,-39.8 8.79,-37.99 8.79,-36.87 9.58,-36.08 10.06,-36.08 10.82,-35.32 10.82,-33.23 10.56,-32.97 v1(10.02,-32.97) ; v1(11.48,-22.07) 11.97,-22.07 12.13,-21.91 12.13,-21.38 12.18,-21.33 12.18,-20.98 12.14,-20.94 12.14,-19.48 11.91,-19.25 v1(11.91,-18.72) ; v1(12.76,-18.74) 12.76,-18.21 12.62,-18.07 12.62,-15.82 13.16,-15.28 v1(14.91,-15.28) ; v1(15.53,-15.29) 17.14,-15.29 v1(17.15,-15.28) ; v1(17.71,-15.92) 17.75,-15.88 U74.M4@18.3,-15.88
Net-(U74-INTR#): R162.1 U74.L5 | length 16.4
  F.Cu w0.08: v2(15.17,-17.91) 15.79,-17.91 16.29,-17.41 16.62,-17.41 17.12,-17.91 v3(17.12,-18.66)
  F.Cu w0.3: v3(21.57,-20.91) R162.1@22.37,-20.91
  In1.Cu w0.08: v3(17.12,-18.66) 17.12,-19.15 17.86,-19.89 20.16,-19.89 21.18,-20.91 v3(21.57,-20.91)
  In8.Cu w0.08: v2(15.17,-17.91) 15.75,-18.49 16.4,-18.49 16.89,-18 v1(16.89,-16.57)
  B.Cu w0.08: v1(16.89,-16.57) 17.21,-16.57 17.54,-16.24 17.85,-16.24 18.16,-16.55 18.97,-16.55 19.57,-17.15 U74.L5@19.57,-17.18
Net-(U74-SYSCLK): R317.1 U74.C1 | length 44.7
  In3.Cu w0.08: v2(-4.77,-27.6) -4.07,-26.9 13.28,-26.9 v2(13.72,-27.34)
  In6.Cu w0.08: v2(-5.12,-4.29) -5.12,-8.57 -5.5,-8.95 -5.5,-26.825 -4.77,-27.555 v2(-4.77,-27.6)
  B.Cu w0.08: R317.1@-5.82,-3.59 R317.1@-5.82,-3.42 ; v2(13.72,-27.34) 13.73,-27.33 U74.C1@14.495,-27.33
  B.Cu w0.2: R317.1@-5.82,-3.59 v2(-5.12,-4.29)
Net-(U75-INT): R199.2 R204.1 U75.15 | length 9
  F.Cu w0.08: R204.1@0.96,-41.99 1.65,-41.99 2.67,-40.97 R199.2@3.54,-40.97 3.54,-39.36 v2(3.59,-39.31)
  B.Cu w0.08: v2(3.59,-39.31) 5.62,-39.31 6.09,-39.78 U75.15@6.09,-41.44
Net-(U75-P1B0): R197.1 R202.2 U75.17 | length 12
  F.Cu w0.08: R197.1@-0.26,-41.99 -0.26,-42.59 0.26,-43.11 v2(3.36,-43.11) 3.87,-43.62 5.35,-43.62 5.81,-43.16 5.81,-41.43 5.35,-40.97 R202.2@4.79,-40.97
  B.Cu w0.4: v2(3.36,-43.11) 3.59,-42.88 U75.17@3.59,-41.465
Net-(U76-A30): R395.2 U76.T6 | length 4.5
  In8.Cu w0.08: v1(7.22,-14.81) 8.74,-14.81 8.99,-15.06 v1(9.39,-15.06)
  B.Cu w0.08: U76.T6@7.21,-14.2 7.21,-14.8 v1(7.22,-14.81) ; v1(9.39,-15.06) 9.4,-15.07 R395.2@10.98,-15.07
Net-(U76-CLK_CPU): R252.2 R253.1 U76.A9 | length 51.8
  In6.Cu w0.08: v2(-12.67,-18.04) -11.1,-18.04 -10.67,-17.61 -10.67,12.63 -10.59,12.71 -10.59,19.8 -10.72,19.93 -10.72,22.15 -10.21,22.66 v2(-8.75,22.66)
  In8.Cu w0.08: v1(-9.98,26.79) -9.98,26.27 v1(-9.47,25.76)
  B.Cu w0.08: R253.1@-10.45,28.31 -10.45,28.11 -10.18,27.84 -10.18,26.99 v1(-9.98,26.79) ; v1(-9.47,25.76) v1@-9.46,25.75 ; v2(-8.75,22.66) -8.75,25.73 R252.2@-8.73,25.75
  B.Cu w0.4: v2(-12.67,-18.04) -11.87,-18.04 U76.A9@-11.84,-18.01 ; v1@-9.46,25.75 R252.2@-8.73,25.75
Net-(X1--): C27.1 R40.2 X1.2 | length 5
  F.Cu w0.3: R40.2@-48.1,23.01 -47.48,23.01 -47.16,22.69 -47.16,22.39 -47.07,22.3 C27.1@-46.51,22.3 -46.51,22.91 -46.08,23.34 X1.2@-46.08,25.11
OKI_CE#: U21.142 U36.14 | length 49
  F.Cu w0.08: U21.142@-13.18,8.535 -13.18,6.74 -12.35,5.91 v3(-10.42,5.91) ; v3(-10.23,-20.7) -7.7,-20.7 v3(-7.68,-20.68) ; v3(-7.68,-25.51) -2.46,-25.51 -1.65,-26.32 -1.65,-26.52 -0.86,-27.31 U36.14@0.63,-27.31
  In1.Cu w0.08: v3(-10.42,5.91) -10.42,0.08 -10,-0.34 -10,-10.52 -9.5,-11.02 -9.5,-11.32 -9.78,-11.6 -9.78,-14.13 -10.18,-14.53 -10.18,-15.32 -10.36,-15.5 -10.36,-18.07 -10.23,-18.2 v3(-10.23,-20.7) ; v3(-7.68,-25.51) -7.68,-25.26 -7.82,-25.12 -7.82,-21.04 -7.68,-20.9 v3(-7.68,-20.68)
OKI_SA12: U21.9 U36.40 | length 44.9
  F.Cu w0.08: v3(-20.36,-11.21) -18.85,-11.21 v3(-18.84,-11.2) ; v3(-18.31,2.58) -18.28,2.61 U21.9@-16.153,2.61
  In1.Cu w0.08: v3(-20.36,-11.21) -20.36,-11.79 -20.23,-11.92 -20.23,-15.29 -20.56,-15.62 -20.56,-18.68 -20.84,-18.96 -20.84,-21.88 -19.44,-23.28 -18.39,-23.28 -17.6,-24.07 -17.6,-29.52 -16.79,-30.33 -14.94,-30.33 -14.42,-30.85 v3(-14.42,-31.31) ; v3(-18.84,-11.2) -18.84,-8.9 -18.34,-8.4 -18.34,-7.54 -18.83,-7.05 -18.83,-5.53 -18.16,-4.86 -17.92,-4.86 -17.13,-4.07 -17.13,-0.51 -18.49,0.85 -18.89,0.85 -19.15,1.11 -19.15,1.75 -18.32,2.58 v3(-18.31,2.58)
OKI_SA13: U21.7 U36.39 | length 40.2
  F.Cu w0.08: v3(-17.18,3.56) U21.7@-16.153,3.56 ; v3(-16.27,-29.22) -16.27,-30.01 -15.77,-30.51 U36.39@-14.42,-30.51
  In1.Cu w0.08: v3(-17.18,3.56) -17.18,3.51 -16.75,3.08 -16.75,-7.9 -17.17,-8.32 -17.17,-13.88 -17.72,-14.43 -17.72,-20.55 -18.06,-20.89 -18.56,-20.89 -19.39,-21.72 -19.39,-22.81 -19.1,-23.1 -18.26,-23.1 -17.41,-23.95 -17.41,-28.4 -16.59,-29.22 v3(-16.27,-29.22)
OKI_SA14: U21.6 U36.38 | length 40.3
  F.Cu w0.08: U21.6@-16.153,4.06 -15.09,4.06 -14.89,3.86 v3(-14.89,3.42) ; U36.38@-14.42,-29.71 -13.02,-29.71 -11.87,-28.56 -11.87,-19.67 v3(-12.71,-18.83)
  In1.Cu w0.08: v3(-14.89,3.42) -15.16,3.15 -15.16,-8.63 -15.83,-9.3 -15.83,-14.72 -16.17,-15.06 -16.17,-15.48 -16.02,-15.63 -16.02,-16.45 -15.97,-16.5 -15.97,-17.64 -15.7,-17.91 -13.63,-17.91 v3(-12.71,-18.83)
OKI_SA15: U21.5 U36.37 | length 54.8
  F.Cu w0.08: v3(-22.19,-0.14) -22.19,-4.26 v3(-22.17,-4.28) ; v3(-20.86,-33.5) -17.26,-33.5 -17.01,-33.25 -17.01,-29.39 -16.53,-28.91 U36.37@-14.42,-28.91 ; v3(-19.96,4.67) -19.9,4.61 -16.203,4.61 U21.5@-16.153,4.56
  In1.Cu w0.08: v3(-22.19,-0.14) -20.49,1.56 -20.49,2.77 -19.96,3.3 v3(-19.96,4.67) ; v3(-22.17,-4.28) -21.67,-4.78 -21.67,-7.15 -21.135,-7.685 -21.135,-8.265 -21.44,-8.57 -21.44,-12.2 -20.995,-12.645 -20.995,-13.825 -21.44,-14.27 -21.44,-16.37 -21.58,-16.51 -21.58,-24.8 -21.51,-24.87 -21.51,-29.21 -20.86,-29.86 v3(-20.86,-33.5)
OKI_SA16: U21.4 U36.36 | length 46.5
  F.Cu w0.08: v3(-22.57,-26.6) -22.09,-27.08 -17.18,-27.08 -16.15,-28.11 U36.36@-14.42,-28.11 ; v3(-22.49,-5.34) -22.49,0.08 -22.05,0.52 v3(-22.05,0.76) ; v3(-21.49,4.66) -21.19,4.96 -17.73,4.96 -17.623,5.067 U21.4@-16.153,5.067
  In1.Cu w0.08: v3(-22.57,-26.6) -22.57,-25.35 -22.26,-25.04 -22.26,-12.28 -21.98,-12 -21.98,-7.78 -21.87,-7.67 -21.87,-6.64 -22.49,-6.02 v3(-22.49,-5.34) ; v3(-22.05,0.76) -22.05,1.96 -21.49,2.52 v3(-21.49,4.66)
OKI_SA17: U21.3 U36.5 | length 57.2
  F.Cu w0.08: v3(-17.67,-21.13) -17.67,-21.69 -17.47,-21.89 -17.47,-23.73 -16.8,-24.4 v3(-16.08,-24.4) ; v3(-9.11,-29.51) -9.11,-33.12 -7.72,-34.51 U36.5@0.63,-34.51
  F.Cu w0.2: v3(-17.49,5.4) -17.33,5.56 U21.3@-16.153,5.56
  In1.Cu w0.08: v3(-17.67,-21.13) -17.65,-21.11 -17.65,-20.78 -17.52,-20.65 -17.52,-14.52 -16.99,-13.99 -16.99,-8.43 -16.57,-8.01 -16.57,4.48 v3(-17.49,5.4) ; v3(-16.08,-24.4) -15.68,-24.4 -15.65,-24.43 -15.65,-26.31 -12.45,-29.51 v3(-9.11,-29.51)
OKI_SA18: U21.2 U36.4 | length 64.5
  F.Cu w0.08: v3(-18.34,-5.5) -18.96,-4.88 -18.96,-2.81 -19.05,-2.72 -19.05,0.65 -18.87,0.83 -17.72,0.83 -17.43,1.12 -17.43,1.56 -17.65,1.78 v3(-17.87,1.78) ; v2(-12.55,-33.25) -12.55,-34.82 -12.54,-34.83 -12.54,-34.87 -12.1,-35.31 U36.4@0.63,-35.31
  In1.Cu w0.08: v2(-18.35,-10.72) -18.32,-10.69 -18.32,-8.72 -17.34,-7.74 -17.34,-7.16 -17.61,-6.89 -18.18,-6.89 -18.34,-6.73 v3(-18.34,-5.5) ; v3(-17.87,1.78) -17.87,2.59 -18.4,3.12 -18.92,3.12 -19.26,3.46 -19.26,5.51 -18.71,6.06 v3(-16.153,6.06)
  In6.Cu w0.08: v2(-18.35,-10.72) -17.71,-10.72 -17.31,-11.12 -17.31,-15.07 -14.64,-17.74 -14.64,-17.81 -14.635,-17.815 -14.635,-32.365 -13.75,-33.25 v2(-12.55,-33.25)
OKI_SA19: U21.143 U36.45 | length 58.6
  F.Cu w0.08: v3(-21.86,-3.93) -21.85,-3.92 -21.85,0.28 -21.74,0.39 v3(-21.74,1.01) ; v3(-21.01,4.65) -20.39,4.65 v3(-20.37,4.67) ; v3(-19.15,-34.39) -19.15,-34.81 -18.7,-35.26 U36.45@-14.42,-35.26
  In1.Cu w0.08: v3(-21.86,-3.93) -21.47,-4.32 -21.47,-6.98 -20.9,-7.55 -20.9,-8.36 -21.23,-8.69 -21.23,-12.05 -20.79,-12.49 -20.79,-14.01 -21.23,-14.45 -21.23,-16.56 -21.41,-16.74 -21.41,-22.86 -20.6,-23.67 -19.11,-23.67 -18.86,-23.92 -18.86,-24.49 -18.05,-25.3 -18.05,-26.67 -19.15,-27.77 v3(-19.15,-34.39) ; v3(-21.74,1.01) -21.74,1.63 -21.01,2.36 v3(-21.01,4.65) ; v3(-20.37,4.67) -20.37,5.03 -20.48,5.14 -20.48,6.51 -19.36,7.63 -17.65,7.63 -16.68,8.6 -13.745,8.6 v3(-13.68,8.535)
PCMCIA_BALE: U61.K15 U74.D1 | length 45.4
  In4.Cu w0.08: v2(-1.08,1.24) -1.08,0.59 -0.69,0.2 -0.69,-0.4 -1.35,-1.06 -1.35,-1.61 -0.03,-2.93 -0.03,-3.47 1.13,-4.63 1.13,-16.76 0.92,-16.97 0.92,-17.93 1.13,-18.14 1.13,-22.45 1.9,-23.22 4.47,-23.22 5.265,-24.015 10.425,-24.015 10.55,-23.89 10.82,-23.89 v2(11.59,-23.12)
  In8.Cu w0.08: v2(-1.08,1.24) -1.08,2 -0.63,2.45 v1(-0.63,3.54)
  B.Cu w0.08: v2(11.59,-23.12) 11.85,-22.86 12.76,-22.86 13.02,-23.12 13.5,-23.12 13.77,-23.39 13.77,-24.43 13.5,-24.7 13.5,-25.75 13.81,-26.06 U74.D1@14.495,-26.06 14.495,-26.065 U74.D1@14.49,-26.07
PCMCIA_CLK: R317.2 U61.H16 | length 7.4
  In8.Cu w0.08: v1(-3.53,-0.49) -3.53,1.64 v1(-3.5,1.67)
  B.Cu w0.08: R317.2@-5.82,-2.4 -5.82,-1.99 -6.1,-1.71 -6.1,-1.18 -5.86,-0.94 -5.14,-0.94 -4.69,-0.49 v1(-3.53,-0.49) ; v1(-3.5,1.67) -3.24,1.67 -2.98,1.93 U61.H16@-2.98,2.3
PCMCIA_CS: R160.2 U38.6 U61.R14 | length 124.7
  F.Cu w0.08: v3(-18.43,-17.98) v2(-16.87,-17.98) ; v2(8.19,-27.67) 8.58,-28.06 9.81,-28.06 10.47,-27.4 11.24,-27.4 11.44,-27.6 11.44,-27.91 11.6,-28.07 11.98,-28.07 12.4,-28.49 v3(12.4,-28.5)
  In1.Cu w0.08: v3(-19.38,-12.52) -19.38,-14.75 -18.57,-15.56 -18.57,-16.27 -18.79,-16.49 -19.09,-16.49 -19.16,-16.42 -19.39,-16.42 -19.88,-16.91 -19.88,-17.97 -19.68,-18.17 -19.01,-18.17 -18.82,-17.98 v3(-18.43,-17.98) ; v3(12.4,-28.5) 12.4,-30.87 12.19,-31.08 12.19,-31.81 12.5,-32.12 13.36,-32.12 13.45,-32.03 14.2,-32.03 14.24,-32.07 19.16,-32.07 20.38,-33.29 26.43,-33.29 v3(26.44,-33.3)
  In4.Cu w0.08: v2(-19.67,-26.28) -19.99,-26.28 -20.51,-25.76 -20.51,-21.27 -17.22,-17.98 v2(-16.87,-17.98)
  In5.Cu w0.08: v2(-19.67,-26.28) -19.67,-26.71 -19.21,-27.17 -17.65,-27.17 -16.9,-27.92 -11.26,-27.92 -10.64,-27.3 -7.23,-27.3 -6.56,-27.97 -0.58,-27.97 0.27,-27.12 0.28,-27.13 7.65,-27.13 v2(8.19,-27.67)
  In8.Cu w0.08: v1(5.95,4.98) 6.27,4.66 6.28,4.66 9.9,4.66 10.04,4.52 10.52,4.04 13.28,4.04 ; v1(7.94,-10.51) 7.74,-10.71 7.74,-12.29 8.45,-13 v1(9.15,-13) ; v1(7.96,-9.42) 8.25,-9.13 8.25,-6.33 7.94,-6.02 7.94,-5.54 8.57,-4.91 v1(8.57,-3.1) ; v2(8.19,-27.67) 8.19,-27.15 7.68,-26.64 7.68,-26.18 8.41,-25.45 8.41,-22.18 9.29,-21.3 v1(9.69,-21.3) ; v1(11.4,-3.08) 11.4,-2.54 12.21,-1.73 13.37,-1.73 14.18,-0.92 14.18,3.14 13.28,4.04 ; 13.28,4.04 14.17,3.15 13.3,4.02 13.28,4.04
  B.Cu w0.08: v1(7.94,-10.51) 7.96,-10.49 v1(7.96,-9.42) ; v1(8.57,-3.1) 11.38,-3.1 v1(11.4,-3.08) ; v1(9.15,-13) 9.15,-13.47 9.03,-13.59 9.03,-15.17 10.27,-16.41 10.27,-19.03 9.69,-19.61 v1(9.69,-21.3)
PCMCIA_KB_sound: C25.2 R35.1 | length 2.1
  F.Cu w0.08: C25.2@12.81,48.875 C25.2@12.82,48.885
  F.Cu w0.3: R35.1@12.73,50.92 12.73,49.99 12.82,49.9 C25.2@12.82,48.885
PCMCIA_REFRESH: U61.E14 U74.H1 | length 70.9
  In3.Cu w0.08: v2(-9.96,-21.21) -9.96,-21.16 -9.33,-20.53 -7.06,-20.53 -5.92,-21.67 7.08,-21.67 7.31,-21.44 7.31,-20.87 7.85,-20.33 11.19,-20.33 11.42,-20.56 12.14,-20.56 12.56,-20.98 13.24,-20.98 v2(13.54,-20.68)
  In4.Cu w0.08: v2(-9.96,-21.21) -10.53,-21.78 -10.53,-28.1 -10.43,-28.2 -8.75,-28.2 -7.94,-27.39 -7.94,5.38 -7.86,5.46 -7.84,5.44 v2(-7.53,5.44)
  B.Cu w0.08: v2(-7.53,5.44) -7.52,5.44 -6.92,4.84 U61.E14@-6.79,4.84 ; v2(13.54,-20.68) 13.84,-20.98 U74.H1@14.495,-20.98
PCMCIA_SBHE#: U61.F12 U74.C3 | length 61
  In4.Cu w0.08: v2(-2.35,6.75) -2.27,6.67 -2.27,5.97 -1.95,5.65 -1.95,5.19 -2.15,4.99 -2.15,-3.21 -2.99,-4.05 -2.99,-4.87 -3.77,-5.65 -4.46,-5.65 -5.35,-6.54 -5.35,-22.52 -3.44,-24.43 10.57,-24.43 10.76,-24.24 14.75,-24.24 15.87,-25.36 15.87,-26.26 v2(16.4,-26.79)
  B.Cu w0.08: U61.F12@-5.52,7.38 -5.13,7.38 -4.46,8.05 -2.5,8.05 -2.35,7.9 v2(-2.35,6.75) ; v2(16.4,-26.79) 16.4,-26.81 16.92,-27.33 U74.C3@17.035,-27.33
PCMCIA_Sound: C207.2 R120.2 U74.N3 | length 72.2
  F.Cu w0.08: v3(11.33,19.74) 13.45,19.74 14.295,20.585 14.295,26.955 v3(13.78,27.47) ; v3@13.51,-10.59 v3(13.52,-10.6)
  F.Cu w0.4: R120.2@12.62,-10.59 v3@13.51,-10.59
  In1.Cu w0.08: v2(11.03,33.7) 12,33.7 13.76,31.94 13.76,27.49 v3(13.78,27.47) ; v3(11.33,19.74) 11.03,19.44 11.03,15.33 12.3,14.06 12.3,10.02 14.55,7.77 14.55,5.33 18.88,1 18.88,-3.22 v2(18.39,-3.71) ; v3(13.52,-10.6) 13.67,-10.45 v2(13.67,-8.23)
  In6.Cu w0.08: v2(13.67,-8.23) 14.93,-6.97 14.93,-5.95 17.17,-3.71 v2(18.39,-3.71)
  In8.Cu w0.08: v2(11.03,33.7) 10.73,34 10.73,36.71 11.725,37.705 v1(12.35,37.705) ; v2(13.67,-8.23) 13.3,-8.6 13.3,-8.94 13.73,-9.37 14.03,-9.37 14.22,-9.18 14.9,-9.18 15.14,-8.94 15.94,-8.94 16.11,-9.11 16.11,-10.42 16.05,-10.48 16.05,-12.14 15.99,-12.2 15.99,-13.32 15.72,-13.59 15.72,-14.06 16.24,-14.58 16.82,-14.58 v1(17.06,-14.34)
  B.Cu w0.08: U74.N3@17.03,-14.61 17.06,-14.58 v1(17.06,-14.34)
PCMCIA_ZEROWS#: U61.H15 U74.L3 | length 37.8
  In8.Cu w0.08: v1(0.24,4.16) 3.05,4.16 v1(3.07,4.18) ; v1(4.08,4.24) 4.08,3.4 4.99,2.49 4.99,1.44 5.27,1.16 v1(5.27,-5.84) ; v1(12.65,-10.83) 12.65,-11.03 13.15,-11.53 13.95,-11.53 14.15,-11.73 14.15,-15.4 14.55,-15.8 15.15,-15.8 15.62,-16.27 15.62,-16.61 16.14,-17.13 v1(16.46,-17.13)
  B.Cu w0.08: U61.H15@-2.98,3.57 -2.36,4.19 0.21,4.19 v1(0.24,4.16) ; v1(3.07,4.18) 4.02,4.18 v1(4.08,4.24) ; v1(5.27,-5.84) 7.47,-5.84 9.69,-8.06 9.69,-8.98 10.25,-9.54 10.8,-9.54 11,-9.34 11.67,-9.34 12.65,-10.32 v1(12.65,-10.83) ; v1(16.46,-17.13) 16.48,-17.15 U74.L3@17.03,-17.15
Pluto_50: R276.1 U35.50 | length 119.6
  F.Cu w0.3: U35.50@4.46,-28.25 5.64,-28.25 v2(5.67,-28.28)
  In5.Cu w0.08: v2(-45.52,-24.54) -42.86,-24.54 -38.36,-29.04 -31.76,-29.04 -30.8,-28.08 -20.36,-28.08 -19.42,-29.02 -6.64,-29.02 -6.45,-28.83 5.59,-28.83 5.67,-28.75 v2(5.67,-28.28)
  In8.Cu w0.08: -45.53,-24.54 -45.52,-24.53 -45.52,-7.51 -45.53,-7.5 -45.53,-7.21 -45.27,-6.95 -45.27,-5.15 -45.59,-4.83 -45.59,11.57 -45.88,11.86 -45.88,12.69 -45.27,13.3 -44.24,13.3 -41.38,16.16 -41.38,19.85 -45.79,24.26 -45.79,29.04 -45.99,29.24 -45.99,32.29 -45.61,32.67 v1(-44.79,32.67)
  B.Cu w0.08: v1(-44.79,32.67) -44.77,32.69 R276.1@-44.77,33.73
Pluto_51: U21.129 U35.51 | length 61.7
  F.Cu w0.08: v3(-6.81,6.69) -6.81,7.09 -6.68,7.22 U21.129@-6.68,8.535 ; v3(5.28,-31.42) 5.91,-30.79 U35.51@5.91,-29.75
  In1.Cu w0.08: v3(-6.81,6.69) -6.81,5.47 -6.91,5.37 -6.91,-0.31 -6.43,-0.79 -6.43,-5.62 -7.15,-6.34 -7.15,-7.26 -7.81,-7.92 -7.81,-11.47 -7.03,-12.25 -7.03,-15.95 -7.025,-15.955 -7.025,-16.265 -7.03,-16.27 -7.03,-16.63 -6.09,-17.57 -6.09,-21.88 -6.35,-22.14 -6.35,-23.44 -6.1,-23.69 -6.1,-31.23 -4,-33.33 -4,-34.92 -2.47,-36.45 -1.9,-36.45 -0.85,-35.4 4.11,-35.4 5.28,-34.23 v3(5.28,-31.42)
Pluto_52: R85.1 U35.52 | length 81.8
  F.Cu w0.08: v3(-48.01,-9.83) -42.02,-9.83 -41.53,-9.34 R85.1@-41.16,-9.34 ; v3(-47.95,-25.44) -44.84,-25.44 v2(-44.8,-25.48)
  F.Cu w0.2: v2(6.34,-28.3) 6.51,-28.47 U35.52@6.51,-29.75
  In1.Cu w0.08: v3(-48.01,-9.83) -48.01,-10.97 -47.65,-11.33 -47.65,-14.32 -47.06,-14.91 -47.06,-15.82 -47.95,-16.71 v3(-47.95,-25.44)
  In3.Cu w0.08: v2(-44.8,-25.48) -29.91,-25.48 -29.27,-26.12 -24.7,-26.12 -23.54,-24.96 -22.69,-24.96 -22.635,-25.015 -9.995,-25.015 -7.65,-27.36 -6.53,-27.36 -5.23,-28.66 6.19,-28.66 6.34,-28.51 v2(6.34,-28.3)
Pluto_72: D30.1 D30.2 R156.2 U35.72 | length 81.1
  F.Cu w0.08: U35.72@16.51,-29.75 16.51,-31.28 16.82,-31.59 v2(17.19,-31.59)
  F.Cu w0.5: D30.2@-38.82,-14.46 v3(-37.82,-14.46)
  In1.Cu w0.08: v3(-37.82,-14.46) -37.58,-14.7 v3(-37.58,-15.9) -37.58,-16.14 -37.34,-16.38 -37.34,-32.61 v2(-36.83,-33.12)
  In5.Cu w0.08: v2(-36.83,-33.12) -36.83,-33.73 -34.9,-35.66 -33.7,-35.66 -32.78,-34.74 -30.36,-34.74 -29.66,-35.44 -23.45,-35.44 -22.97,-35.92 -18.12,-35.92 -17.75,-35.55 -9.92,-35.55 -6.83,-32.46 4.74,-32.46 5.43,-33.15 11.81,-33.15 13.38,-31.58 17.18,-31.58 v2(17.19,-31.59)
Pluto_73: D31.1 D31.2 R152.2 U35.73 | length 150
  F.Cu w0.08: D31.1@-28.76,-18.75 D31.1@-28.68,-18.83 ; v3(17.01,-29.75) 17.01,-30.93 17.17,-31.09 17.53,-31.09 v2(17.86,-31.42) ; v3(32.64,-32.6) v3(32.64,-29.76)
  F.Cu w0.4: D31.2@-29.76,-18.75 D31.1@-28.76,-18.75 ; v3(-28.68,-19.94) D31.1@-28.68,-18.83
  In1.Cu w0.08: v2(-29.18,-34.82) -29.18,-34.27 -28.93,-34.02 -28.93,-30.32 -29.15,-30.1 -29.15,-25.79 -29.22,-25.72 -29.22,-20.48 v3(-28.68,-19.94) ; v3(17.01,-29.75) 17.01,-29.5 17.4,-29.11 19.89,-29.11 20.13,-28.87 21.31,-28.87 21.79,-28.39 24.22,-28.39 24.46,-28.15 24.93,-28.15 25.34,-28.56 28.16,-28.56 28.44,-28.84 31.72,-28.84 v3(32.64,-29.76) ; v3(32.64,-32.6) 32.64,-33.22 35.08,-35.66 35.08,-37.71 35.91,-38.54 v2(38.39,-38.54)
  In3.Cu w0.08: v2(38.39,-38.54) 38.82,-38.11 v4(51.74,-38.11)
  In5.Cu w0.08: v2(-29.18,-34.82) -28.76,-35.24 -23.21,-35.24 -22.72,-35.73 -18.39,-35.73 -18.03,-35.37 -10.08,-35.37 -7,-32.29 4.87,-32.29 5.53,-32.95 10.5,-32.95 12.47,-30.98 17.42,-30.98 v2(17.86,-31.42)
  In8.Cu w0.08: v1(48.038,-15.928) 48.798,-15.928 49.57,-16.7 49.57,-18.17 50.83,-19.43 53.88,-19.43 54.51,-20.06 54.51,-31.06 55.6,-32.15 55.6,-33.58 53.48,-35.7 48.49,-35.7 48.04,-36.15 48.04,-37.27 48.88,-38.11 v4(51.74,-38.11)
Pluto_BIOS_WR_EN: D19.3 U35.53 | length 51.3
  F.Cu w0.08: v2(6.58,-25.12) 6.58,-26.7 7.01,-27.13 U35.53@7.01,-29.75
  F.Cu w0.4: D19.3@8.67,2.71 8.67,3.64 v2(8.75,3.72)
  In6.Cu w0.08: v2(6.58,-25.12) 7.21,-25.12 7.62,-25.53 8.31,-25.53 9.5,-24.34 11.87,-24.34 12.47,-23.74 12.47,-23.31 11.81,-22.65 11.32,-22.65 10.27,-23.7 9.86,-23.7 9.61,-23.45 9.61,-22.48 10.09,-22 10.09,-21.27 9.91,-21.09 9.91,-19.27 10.07,-19.11 10.07,-15.16 11.23,-14 11.23,-10.52 10.69,-9.98 10.24,-9.98 9.64,-9.38 9.64,-7.15 9.56,-7.07 9.56,-5.87 8.58,-4.89 7.55,-4.89 6.75,-4.09 6.75,4.36 7.28,4.89 8.42,4.89 8.75,4.56 v2(8.75,3.72)
Pluto_CLK: R348.1 U35.65 | length 74.7
  F.Cu w0.3: U35.65@13.01,-29.75 13.01,-28.58 v2(13.1,-28.49)
  In3.Cu w0.08: v2(-34.08,-26.9) -34,-26.82 -29.54,-26.82 -28.82,-27.54 -26.99,-27.54 -26.29,-26.84 -19.42,-26.84 -17.07,-29.19 12.4,-29.19 v2(13.1,-28.49)
  In6.Cu w0.08: v2(-34.08,-26.9) -34.08,-26.01 -33.91,-25.84 -33.91,-25.11 -33.93,-25.09 -33.93,-3.52 v2(-33.91,-3.5)
  B.Cu w0.4: v2(-33.91,-3.5) -33.89,-3.48 R348.1@-33.89,-2.64
Pluto_Dock_IO1: J13.2 R139.2 U35.28 | length 121.6
  F.Cu w0.08: U35.28@4.46,-17.15 4.5,-17.11 v3(5.89,-17.11) ; v3(8.5,-18.19) 8.95,-18.19 9.09,-18.33 9.58,-18.33 9.94,-17.97 9.94,-17.57 v2(9.63,-17.26) ; R139.2@84.45,0.03 84.45,0.27 84.83,0.65 86.5,0.65 87.06,0.09 v4(87.06,-0.39)
  In1.Cu w0.08: v3(5.89,-17.11) 6.55,-17.77 7.85,-17.77 8.27,-18.19 v3(8.5,-18.19)
  In3.Cu w0.08: v2(9.63,-17.26) 9.63,-17.1 10.38,-16.35 11.99,-16.35 12.695,-17.055 33.285,-17.055 35.35,-14.99 37.12,-14.99 39.75,-17.62 40.32,-17.62 41.33,-16.61 42.83,-16.61 43.05,-16.83 44.78,-16.83 45.26,-17.31 v4(45.26,-18.21)
  In4.Cu w0.08: v4(80.8,-18.34) 80.8,-18.17 81.43,-17.54 84.18,-17.54 84.91,-16.81 84.91,-11.78 84.6,-11.47 84.6,-6.78 85.67,-5.71 85.67,-0.71 85.98,-0.4 86.04,-0.4 86.05,-0.39 v4(87.06,-0.39)
  In5.Cu w0.08: v4(45.26,-18.21) 47.9,-18.21 48.48,-18.79 51.53,-18.79 52.45,-19.71 59.58,-19.71 59.91,-20.04 61.27,-20.04 62.97,-18.34 v4(80.8,-18.34)
  In8.Cu w0.08: v1(86.14,9.3) 86.14,5.85 87.56,4.43 v1(87.85,4.43)
  B.Cu w0.08: v4(87.06,-0.39) 87.85,0.4 v1(87.85,4.43)